# EAGLE board 0605 (EAGLE 9.6.2)
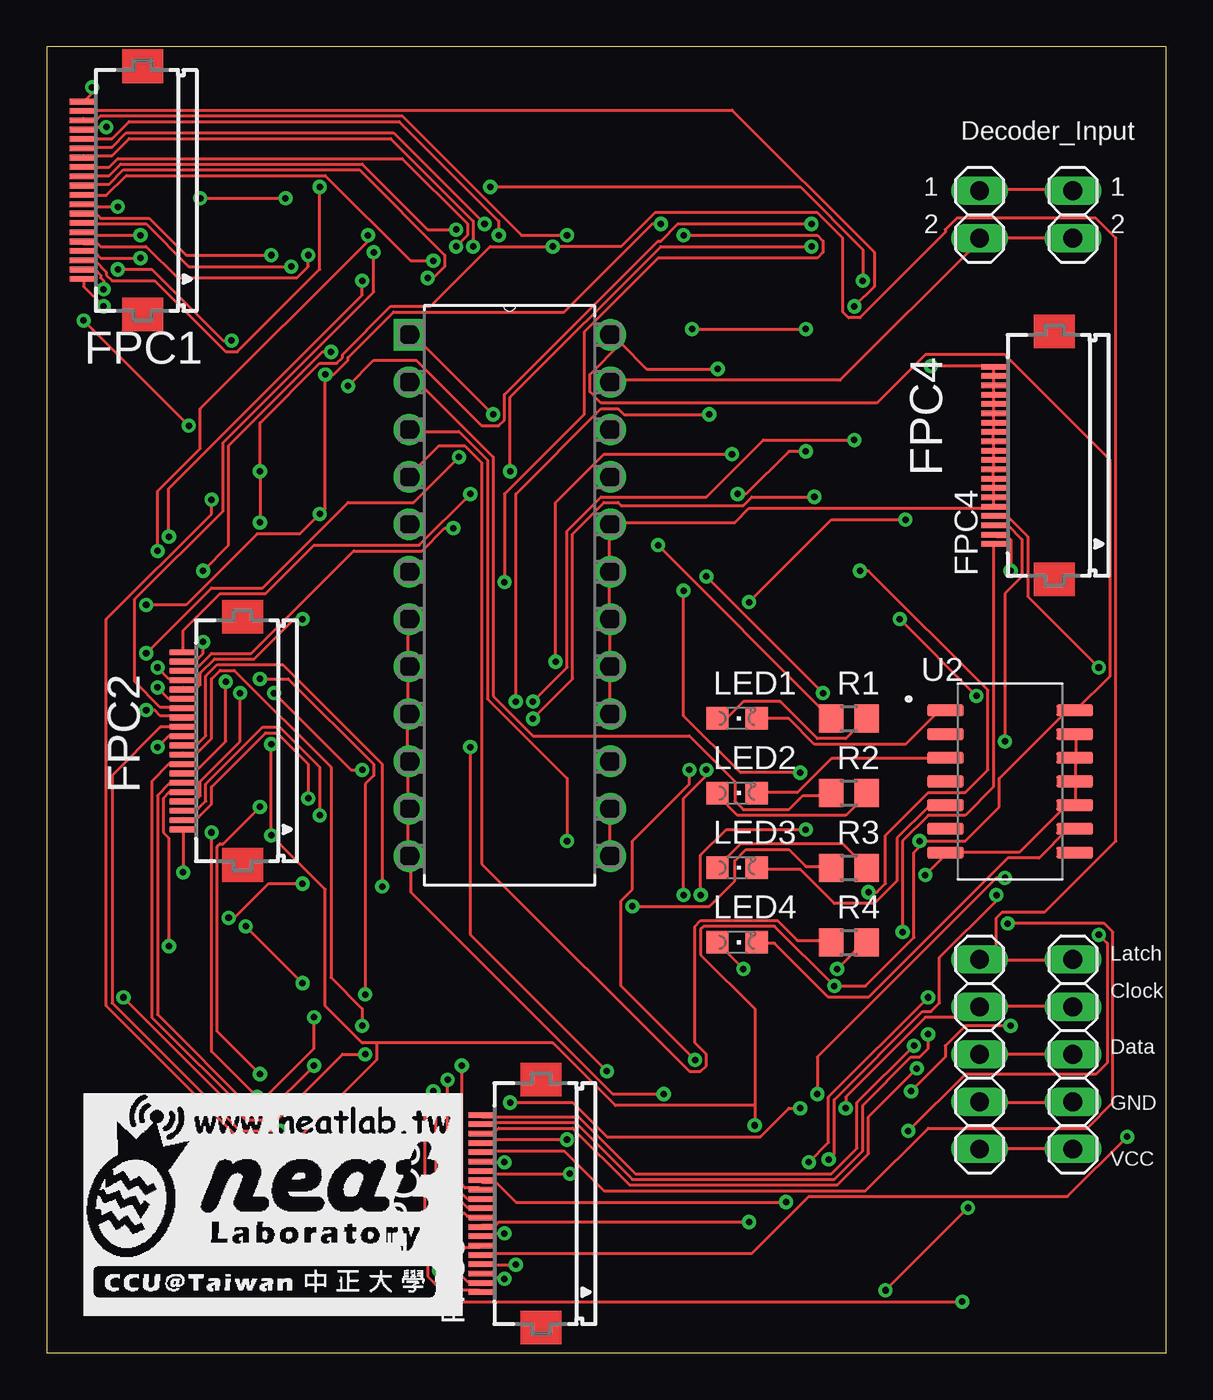
[diagram p0: board, top side]
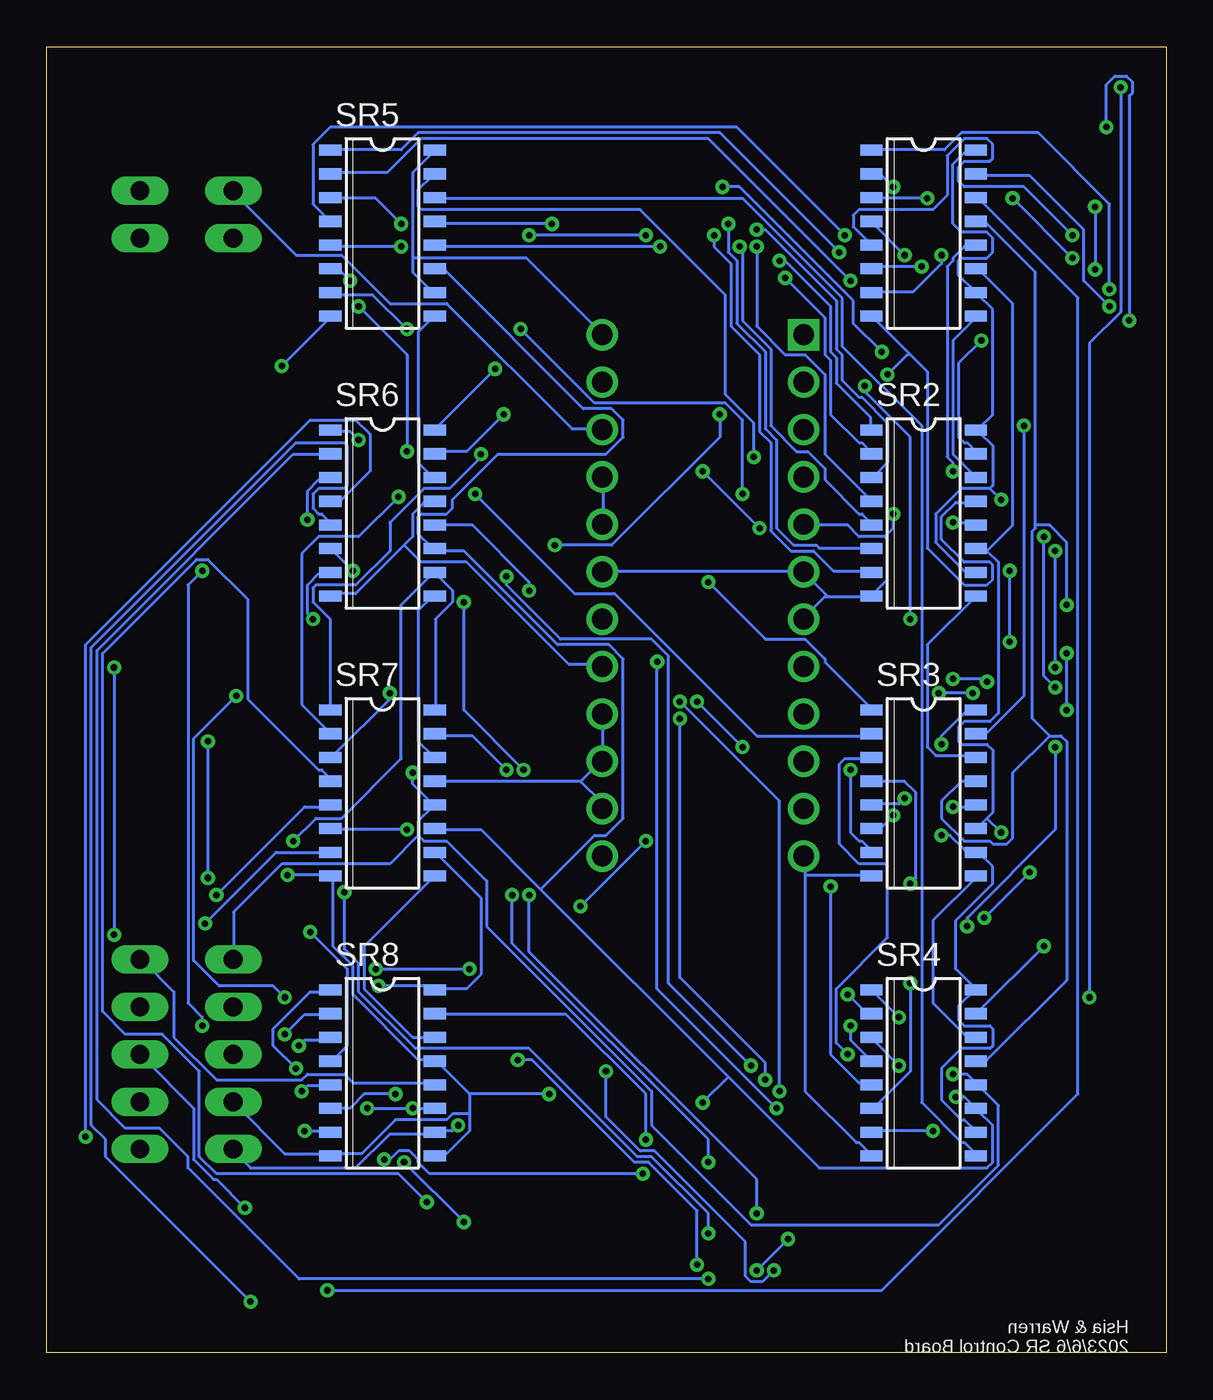
[diagram p1: board, bottom side, seen from below]

Size 60 x 70 mm. Coordinates in mm from the lower left corner, seen from the top.
Outline: 0,0 60,0 60,70 0,70 0,0
Copper layers (1*16): Top 0.035mm / dielectric 1.5mm / Bottom 0.035mm
Design rules "default": minimum track width 6mil, minimum drill 0.35mm, track to track 6mil, track to pad 6mil, pad to pad 6mil, via to via 6mil, smd to smd 6mil, copper to edge 40mil, drill to drill 6mil, minimum pad ring 10mil, minimum via ring 8mil, stop-mask expansion 4mil, vias tented up to drill 0mil, thermal gap 10mil

## Footprints (pad centres in the part's own frame; a part is rotated, then mirrored left to right if it is on the bottom)
FH12-20S-0.5SH = smd 0.3 x 1.3: 1 -4.75,3.25; 2 -4.25,3.25; 3 -3.75,3.25; 4 -3.25,3.25; 5 -2.75,3.25; 6 -2.25,3.25; 7 -1.75,3.25; 8 -1.25,3.25; 9 -0.75,3.25; 10 -0.25,3.25; 11 0.25,3.25; 12 0.75,3.25; 13 1.25,3.25; 14 1.75,3.25; 15 2.25,3.25; 16 2.75,3.25; 17 3.25,3.25; 18 3.75,3.25; 19 4.25,3.25; 20 4.75,3.25
1X02 = drill 1.016 long: 1 -1.27,0; 2 1.27,0
1X05 = drill 1.016 long: 1 -5.08,0; 2 -2.54,0; 3 0,0; 4 2.54,0; 5 5.08,0
CHIPLED_0805 = smd 1.2 x 1.2: A 0,-1.05; C 0,1.05
R0805 = smd 1.3 x 1.5: 1 -0.95,0; 2 0.95,0
SO16 = smd 0.6 x 1.2: 1 -4.445,-2.8; 2 -3.175,-2.8; 3 -1.905,-2.8; 4 -0.635,-2.8; 5 0.635,-2.8; 6 1.905,-2.8; 7 3.175,-2.8; 8 4.445,-2.8; 9 4.445,2.8; 10 3.175,2.8; 11 1.905,2.8; 12 0.635,2.8; 13 -0.635,2.8; 14 -1.905,2.8; 15 -3.175,2.8; 16 -4.445,2.8
DIP254P1080X508-24 = drill 1.118 square: 1 -10.795,27.94 | drill 1.118: 2 -10.795,25.4; 3 -10.795,22.86; 4 -10.795,20.32; 5 -10.795,17.78; 6 -10.795,15.24; 7 -10.795,12.7; 8 -10.795,10.16; 9 -10.795,7.62; 10 -10.795,5.08; 11 -10.795,2.54; 12 -10.795,0; 13 0,0; 14 0,2.54; 15 0,5.08; 16 0,7.62; 17 0,10.16; 18 0,12.7; 19 0,15.24; 20 0,17.78; 21 0,20.32; 22 0,22.86; 23 0,25.4; 24 0,27.94
SOP127P780X200-14N = smd 1.97 x 0.61: 1 -3.465,3.81; 2 -3.465,2.54; 3 -3.465,1.27; 4 -3.465,0; 5 -3.465,-1.27; 6 -3.465,-2.54; 7 -3.465,-3.81; 8 3.465,-3.81; 9 3.465,-2.54; 10 3.465,-1.27; 11 3.465,0; 12 3.465,1.27; 13 3.465,2.54; 14 3.465,3.81

## Placement (x,y rotation side)
FPC1  FH12-20S-0.5SH  [FH12-20S-0.5SH]  5.14,62.3 90 top
FPC2  FH12-20S-0.5SH  [FH12-20S-0.5SH]  10.5,32.8 90 top
FPC3  FH12-20S-0.5SH  [FH12-20S-0.5SH]  26.5,8 90 top
FPC4  FH12-20S-0.5SH  [FH12-20S-0.5SH]  54,48.1 90 top
JP1  [1X02]  55,61 90 top
JP2  [1X05]  55,16 90 top
JP3  [1X02]  50,61 90 top
JP4  [1X05]  50,16 90 top
LED1  [CHIPLED_0805]  37,34 270 top
LED2  [CHIPLED_0805]  37,30 270 top
LED3  [CHIPLED_0805]  37,26 270 top
LED4  [CHIPLED_0805]  37,22 270 top
R1  [R0805]  43,34 0 top
R2  [R0805]  43,30 0 top
R3  [R0805]  43,26 0 top
R4  [R0805]  43,22 0 top
SR1  74HC595  [SO16]  13,60 270 bottom
SR2  74HC595  [SO16]  13,45 270 bottom
SR3  74HC595  [SO16]  13,30 270 bottom
SR4  74HC595  [SO16]  13,15 270 bottom
SR5  74HC595  [SO16]  42,60 270 bottom
SR6  74HC595  [SO16]  42,45 270 bottom
SR7  74HC595  [SO16]  42,30 270 bottom
SR8  74HC595  [SO16]  42,15 270 bottom
U1  SN74154N  [DIP254P1080X508-24]  30.22,26.62 0 top
U2  SN74HC14NSR  [SOP127P780X200-14N]  51.63,30.62 0 top
U$1  [LOGO_SCALE_2.0]  2,2 0 top

## Library data of the parts
FPC1-FPC4 = con-hirose; MPN: FH12-20S-0.5SH(55); OC_FARNELL: 1324549; OC_NEWARK: 34M6166
JP1-JP4 = pinhead
LED1-LED4 = led
R1-R4 = rcl; SPICEPREFIX: R
SR1-SR8 = 74HC595; AVAILABILITY: In Stock; DESCRIPTION: Shift Register Single 8-Bit Serial to Serial/Parallel 16-Pin SSOP T/R; MF: Nexperia; MP: 74HC595; PACKAGE: None; PRICE: None
U1 = SN74154N; AVAILABILITY: In Stock; DESCRIPTION: Decoder/Demultiplexer 1 x 4:16 24-PDIP; MF: Texas Instruments; MP: SN74154N; PACKAGE: DIP-24 Texas Instruments; PRICE: None; PURCHASE-URL: https://pricing.snapeda.com/search?q=SN74154N&ref=eda
U2 = SN74HC14NSR; AVAILABILITY: In Stock; DESCRIPTION: 6-ch, 2-V to 6-V inverters with Schmitt-Trigger inputs; MF: Texas Instruments; MP: SN74HC14NSR; PACKAGE: SOP-14 Texas Instruments; PRICE: None; PURCHASE-URL: https://pricing.snapeda.com/search?q=SN74HC14NSR&ref=eda
U$1 = all_in_one

## Nets
CLK: JP2.4 JP4.4 SR1.11 SR2.11 SR3.11 SR4.11 SR5.11 SR6.11 SR7.11 SR8.11
DATA: JP2.3 JP4.3 SR1.14
DE_IN0: JP1.1 JP3.1 U1.23
DE_IN1: JP1.2 JP3.2 U1.22
DE_OUT0: R1.1 U1.1
DE_OUT1: R2.1 U1.2
DE_OUT2: R3.1 U1.3
DE_OUT3: R4.1 U1.4
GND: FPC4.5 FPC4.6 FPC4.7 FPC4.8 FPC4.9 FPC4.10 FPC4.11 FPC4.12 FPC4.13 FPC4.14 FPC4.15 FPC4.16 FPC4.17 FPC4.18 FPC4.19 FPC4.20 JP2.2 JP4.2 SR1.8 SR1.13 SR2.8 SR2.13 SR3.8 SR3.13 SR4.8 SR4.13 SR5.8 SR5.13 SR6.8 SR6.13 SR7.8 SR7.13 SR8.8 SR8.9 SR8.13 U1.5 U1.6 U1.7 U1.8 U1.9 U1.10 U1.11 U1.12 U1.13 U1.14 U1.15 U1.16 U1.17 U1.18 U1.19 U1.20 U1.21 U2.7 U2.10 U2.11 U2.12 U2.13
INV_IN0: LED1.C U2.1
INV_IN1: LED2.C U2.3
INV_IN2: LED3.C U2.5
INV_IN3: LED4.C U2.9
INV_OUT0: U2.2
INV_OUT1: U2.4
INV_OUT2: U2.6
INV_OUT3: U2.8
LATCH_CLK: JP2.5 JP4.5 SR1.12 SR2.12 SR3.12 SR4.12 SR5.12 SR6.12 SR7.12 SR8.12
N$1: SR1.9 SR2.14
N$2: LED1.A R1.2
N$3: LED2.A R2.2
N$4: LED3.A R3.2
N$5: LED4.A R4.2
N$8: SR2.9 SR3.14
N$15: SR3.9 SR4.14
N$22: SR7.9 SR8.14
N$34: SR6.9 SR7.14
N$36: SR4.9 SR5.14
N$43: SR5.9 SR6.14
SR_OUT1_1: FPC1.1 SR1.15
SR_OUT1_2: FPC1.2 SR1.1
SR_OUT1_3: FPC1.3 SR1.2
SR_OUT1_4: FPC1.4 SR1.3
SR_OUT1_5: FPC1.5 SR1.4
SR_OUT1_6: FPC1.6 SR1.5
SR_OUT1_7: FPC1.7 SR1.6
SR_OUT1_8: FPC1.8 SR1.7
SR_OUT2_1: FPC1.9 SR2.15
SR_OUT2_2: FPC1.10 SR2.1
SR_OUT2_3: FPC1.11 SR2.2
SR_OUT2_4: FPC1.12 SR2.3
SR_OUT2_5: FPC1.13 SR2.4
SR_OUT2_6: FPC1.14 SR2.5
SR_OUT2_7: FPC1.15 SR2.6
SR_OUT2_8: FPC1.16 SR2.7
SR_OUT3_1: FPC1.17 SR3.15
SR_OUT3_2: FPC1.18 SR3.1
SR_OUT3_3: FPC1.19 SR3.2
SR_OUT3_4: FPC1.20 SR3.3
SR_OUT3_5: FPC2.1 SR3.4
SR_OUT3_6: FPC2.2 SR3.5
SR_OUT3_7: FPC2.3 SR3.6
SR_OUT3_8: FPC2.4 SR3.7
SR_OUT4_1: FPC2.5 SR4.15
SR_OUT4_2: FPC2.6 SR4.1
SR_OUT4_3: FPC2.7 SR4.2
SR_OUT4_4: FPC2.8 SR4.3
SR_OUT4_5: FPC2.9 SR4.4
SR_OUT4_6: FPC2.10 SR4.5
SR_OUT4_7: FPC2.11 SR4.6
SR_OUT4_8: FPC2.12 SR4.7
SR_OUT5_1: FPC2.13 SR5.15
SR_OUT5_2: FPC2.14 SR5.1
SR_OUT5_3: FPC2.15 SR5.2
SR_OUT5_4: FPC2.16 SR5.3
SR_OUT5_5: FPC2.17 SR5.4
SR_OUT5_6: FPC2.18 SR5.5
SR_OUT5_7: FPC2.19 SR5.6
SR_OUT5_8: FPC2.20 SR5.7
SR_OUT6_1: FPC3.1 SR6.15
SR_OUT6_2: FPC3.2 SR6.1
SR_OUT6_3: FPC3.3 SR6.2
SR_OUT6_4: FPC3.4 SR6.3
SR_OUT6_5: FPC3.5 SR6.4
SR_OUT6_6: FPC3.6 SR6.5
SR_OUT6_7: FPC3.7 SR6.6
SR_OUT6_8: FPC3.8 SR6.7
SR_OUT7_1: FPC3.9 SR7.15
SR_OUT7_2: FPC3.10 SR7.1
SR_OUT7_3: FPC3.11 SR7.2
SR_OUT7_4: FPC3.12 SR7.3
SR_OUT7_5: FPC3.13 SR7.4
SR_OUT7_6: FPC3.14 SR7.5
SR_OUT7_7: FPC3.15 SR7.6
SR_OUT7_8: FPC3.16 SR7.7
SR_OUT8_1: FPC3.17 SR8.15
SR_OUT8_2: FPC3.18 SR8.1
SR_OUT8_3: FPC3.19 SR8.2
SR_OUT8_4: FPC3.20 SR8.3
SR_OUT8_5: FPC4.1 SR8.4
SR_OUT8_6: FPC4.2 SR8.5
SR_OUT8_7: FPC4.3 SR8.6
SR_OUT8_8: FPC4.4 SR8.7
VCC: JP2.1 JP4.1 SR1.10 SR1.16 SR2.10 SR2.16 SR3.10 SR3.16 SR4.10 SR4.16 SR5.10 SR5.16 SR6.10 SR6.16 SR7.10 SR7.16 SR8.10 SR8.16 U1.24 U2.14

## Tracks (layer width: path | path; a pad name or v marks a point on that pad's centre or on a via)
CLK  (via drill 0.35)
  Top 0.152: v42.82,13.11 42.82,13.72 47.09,17.98 49.53,17.98 49.99,18.44 JP4.4 50.14,18.59 54.86,18.59 JP2.4 | v40.39,13.11 39.78,13.11 38.25,11.58 30.02,11.58 28.19,13.41 v24.84,13.41 | v8.84,27.89 8.84,16.15 v11.28,13.72
  Bottom 0.152: 9.6,28.65 9.3,28.96 9.3,32.31 9.6,32.61 10.97,32.61 11.12,32.77 11.12,33.53 10.82,33.83 9.45,33.83 8.99,34.29 8.99,42.37 9.6,42.98 | 9.6,28.65 10.06,28.19 SR3.11 | 9.6,42.98 10.06,42.98 SR2.11 9.6,42.98 | 9.6,42.98 8.23,44.35 8.23,56.24 10.06,58.06 SR1.11 | v42.82,13.11 v40.39,13.11 39.32,13.11 SR8.11 | 33.53,24.84 36.73,28.04 39.17,28.04 SR7.11 | 33.53,24.84 23.47,14.78 | 23.47,14.78 18.59,9.91 9.6,9.91 9.3,10.21 9.3,12.19 10.06,12.95 SR4.11 10.21,13.11 10.82,13.72 v11.28,13.72 | 33.53,24.84 30.63,27.74 30.02,27.74 29.11,28.65 29.11,37.19 29.87,37.95 32.61,37.95 37.64,42.98 39.17,42.98 SR6.11 39.32,43.13 40.08,43.89 40.08,44.81 39.93,44.96 38.56,44.96 38.25,45.26 38.25,45.72 35.81,48.16 30.02,48.16 29.11,49.07 29.11,49.99 29.72,50.6 31.24,50.6 38.71,58.06 39.17,58.06 SR5.11 | 23.47,14.78 v24.84,13.41 | v8.84,27.89 9.6,28.65
DATA  (via drill 0.35)
  Top 0.152: v49.38,7.77 v44.96,3.35 | JP4.3 50.14,16 54.86,16 JP2.3
  Bottom 0.152: v44.96,3.35 15.24,3.35 4.72,13.87 4.72,56.54 10.06,61.87 SR1.14 | v49.38,7.77 50.9,9.3 51.05,9.3 52.12,10.36 52.12,13.11 54.86,15.85 JP2.3
DE_IN0
  Top 0.152: JP1.1 54.86,59.74 50.14,59.74 JP3.1 49.99,59.59 42.52,52.12 30.33,52.12 U1.23
DE_IN1
  Top 0.152: JP3.2 50.14,62.33 54.86,62.33 JP1.2
  Bottom 0.152: U1.22 30.33,49.53 31.85,49.53 38.56,56.24 41.6,56.24 44.2,58.83 46.63,58.83 49.99,62.18 JP3.2
DE_OUT0  (via drill 0.35)
  Top 0.152: v32.77,43.28 41.91,34.14 R1.1 | v23.93,50.29 19.51,54.71 U1.1
  Bottom 0.152: v32.77,43.28 29.72,43.28 23.93,49.07 v23.93,50.29
DE_OUT1
  Top 0.152: R2.1 41.91,29.87 40.54,29.87 39.78,29.11 37.34,29.11 36.88,29.57 36.88,30.63 34.44,33.07 26.06,33.07 23.93,35.2 23.93,48.01 19.96,51.97 19.51,51.97 U1.2
DE_OUT2  (via drill 0.35)
  Top 0.152: v31.39,23.93 35.51,23.93 36.88,25.3 36.88,26.36 37.49,26.98 39.78,26.98 40.69,26.06 41.91,26.06 R3.1 | v27.89,27.43 27.89,30.79 23.62,35.05 23.62,47.85 22.1,49.38 19.51,49.38 U1.3
  Bottom 0.152: v27.89,27.43 v31.39,23.93
DE_OUT3
  Top 0.152: R4.1 41.91,22.1 40.23,22.1 39.17,23.16 35.05,23.16 34.75,22.86 34.75,16.61 35.36,16 35.36,15.39 35.05,15.09 34.44,15.09 23.32,26.21 23.32,47.7 22.4,48.62 21.03,48.62 19.51,47.09 U1.4
GND  (via drill 0.35)
  Top 0.152: v32.92,60.5 32.46,60.5 27.74,55.78 18.59,55.78 16.15,53.34 16.15,53.19 15.39,52.43 v14.94,52.43 14.94,45.26 v14.63,44.96 13.56,43.89 11.28,43.89 7.47,40.08 v5.33,40.08 | JP2.2 54.86,13.41 50.14,13.41 JP4.2 | U2.13 55.17,33.07 55.17,32 U2.12 55.17,31.85 55.17,30.63 U2.11 55.17,30.48 55.17,29.41 U2.10 55.02,29.26 54.56,29.26 52.12,26.82 48.31,26.82 U2.7 48.16,26.67 v47.09,25.6 | U1.7 19.36,39.32 19.36,36.88 U1.8 19.36,36.73 19.36,34.29 U1.9 19.36,34.14 19.36,31.85 U1.10 19.36,31.7 19.36,29.26 U1.11 19.36,29.11 19.36,26.67 U1.12 19.51,26.52 19.51,24.69 30.33,13.87 v33.07,13.87 | U1.13 30.18,26.67 30.18,29.11 U1.14 | v47.4,52.88 50.75,52.88 FPC4.20 50.75,52.73 50.75,52.43 FPC4.19 50.75,52.27 50.75,51.97 FPC4.18 50.75,51.82 FPC4.17 50.75,51.21 50.75,50.9 FPC4.16 50.75,50.75 50.75,50.44 FPC4.15 50.75,50.29 50.75,49.99 FPC4.14 50.75,49.84 50.75,49.38 FPC4.13 50.75,49.23 50.75,48.92 FPC4.12 50.75,48.77 50.75,48.46 FPC4.11 50.75,48.31 FPC4.10 50.75,47.7 50.75,47.4 FPC4.9 50.75,47.24 50.75,46.94 FPC4.8 50.75,46.79 50.75,46.48 FPC4.7 50.75,46.33 50.75,45.87 FPC4.6 50.75,45.72 50.75,45.41 FPC4.5 50.75,45.26 37.64,45.26 36.88,44.5 30.33,44.5 U1.20 30.18,44.35 30.18,41.91 U1.19 30.18,41.76 30.18,39.47 U1.18 30.18,39.32 30.18,36.88 U1.17 30.18,36.73 30.18,34.29 U1.16
  Bottom 0.152: 6.25,33.07 5.64,33.07 5.33,32.77 5.33,19.96 9.6,15.7 10.06,15.7 SR4.13 | 6.25,33.07 8.23,31.09 8.23,27.58 8.53,27.28 9.3,27.28 9.45,27.43 10.82,27.43 12.04,28.65 12.04,29.57 10.97,30.63 10.21,30.63 SR3.13 | 7.01,44.35 7.01,44.2 7.16,44.04 7.16,33.98 6.25,33.07 | 7.01,44.35 7.01,57.91 9.6,60.5 10.06,60.5 SR1.13 | 13.72,53.49 15.7,55.47 SR1.8 | 13.72,53.49 12.8,52.58 12.8,43.13 10.82,41.15 9.6,41.15 9.3,41.45 9.3,42.22 9.45,42.37 10.82,42.37 12.04,43.59 12.04,44.81 11.28,45.57 10.21,45.57 SR2.13 | v32.92,60.5 39.17,60.5 SR5.13 | v14.94,52.43 13.87,53.49 13.72,53.49 | JP4.2 49.99,13.41 47.24,10.67 44.81,10.67 SR8.8 44.65,10.67 43.13,10.67 41.3,12.5 38.56,12.5 38.25,12.8 37.34,12.8 | 37.34,13.87 37.34,12.8 | 37.34,12.8 37.34,11.89 38.56,10.67 39.17,10.67 SR8.9 | 37.34,13.87 39.17,15.7 SR8.13 39.32,15.7 40.08,15.7 43.59,19.2 43.59,20.73 44.65,21.79 44.65,25.45 SR7.8 44.81,25.6 v47.09,25.6 | 19.36,25.6 19.36,26.52 U1.12 | 19.36,25.6 19.36,14.02 16.61,11.28 16.46,11.28 15.85,10.67 SR4.8 | 19.36,25.6 15.85,25.6 SR3.8 | 18.14,40.54 18.29,40.54 19.36,39.47 U1.7 | 18.14,40.54 15.85,40.54 SR2.8 15.7,40.69 14.94,41.45 14.94,43.59 15.09,43.74 | 18.14,40.54 19.36,41.76 U1.6 19.51,41.91 30.18,41.91 U1.19 | 15.09,43.74 16.46,43.74 17.07,44.35 19.36,44.35 U1.5 | 31.39,30.63 39.17,30.63 SR7.13 | 31.39,30.63 30.33,31.7 U1.15 30.18,31.85 30.18,34.14 U1.16 | 31.39,30.63 30.33,29.57 30.33,29.26 U1.14 | v47.4,52.88 44.81,55.47 SR5.8 | 40.84,43.28 40.39,43.74 40.39,44.96 39.78,45.57 39.32,45.57 SR6.13 | 40.84,43.28 43.43,40.69 44.65,40.69 SR6.8 | U1.20 30.18,44.5 30.18,46.94 U1.21
  Bottom 0.152: 40.84,43.28 39.93,42.37 37.49,42.37 32,36.88 30.33,36.88 U1.17 | v33.07,13.87 37.34,13.87 | v14.63,44.96 14.63,44.2 15.09,43.74 | 7.01,44.35 6.25,44.35 5.33,43.43 v5.33,40.08
INV_IN0
  Top 0.152: LED1.C 38.1,33.98 39.78,33.98 41.15,32.61 46.02,32.61 47.7,34.29 48.16,34.29 U2.1
INV_IN1
  Top 0.152: LED2.C 38.1,30.02 40.23,30.02 42.06,31.85 48.16,31.85 U2.3
INV_IN2
  Top 0.152: LED3.C 38.1,25.91 40.39,25.91 42.22,24.08 44.35,24.08 45.57,25.3 45.57,27.58 47.24,29.26 48.16,29.26 U2.5
INV_IN3
  Top 0.152: LED4.C 38.1,21.95 39.01,21.95 41.91,19.05 44.04,19.05 51.51,26.52 53.19,26.52 54.71,28.04 55.02,28.04 U2.9
LATCH_CLK  (via drill 0.35)
  Top 0.152: v11.43,44.5 v11.43,47.24 11.43,49.84 14.63,53.03 15.54,53.03 15.85,53.34 15.85,53.49 18.44,56.08 20.57,56.08 23.77,59.28 v27.13,59.28 30.79,59.28 32.61,61.11 41.3,61.11 42.67,59.74 42.67,55.78 42.98,55.47 43.59,55.47 48.16,60.05 48.16,60.2 48.77,60.81 56.24,60.81 57.3,59.74 57.3,27.43 53.49,23.62 51.21,23.62 50.9,23.32 50.9,21.03 | 50.9,21.03 54.86,21.03 JP2.5 | 50.9,21.03 50.14,21.03 JP4.5 50.9,21.03 | v11.43,29.26 9.45,27.28 9.3,27.28 9.14,27.13 9.14,17.22 v11.43,14.94 | v34.14,40.84 34.14,34.14 37.19,31.09 v40.39,31.09
  Bottom 0.152: v11.43,44.5 10.21,44.5 SR2.12 | v11.43,47.24 11.43,47.7 11.73,48.01 11.73,58.22 11.43,58.52 11.43,58.67 10.82,59.28 10.21,59.28 SR1.12 | v27.13,59.28 39.17,59.28 SR5.12 | SR8.12 39.32,14.48 43.59,14.48 44.04,14.94 46.02,14.94 46.33,14.63 50.9,14.63 53.19,16.92 53.19,19.36 54.86,21.03 JP2.5 | 40.08,27.74 39.78,27.43 38.56,27.43 36.42,25.3 36.42,22.86 27.58,14.02 27.58,12.19 22.25,6.86 12.19,6.86 8.99,10.06 8.99,13.26 10.06,14.33 SR4.12 10.21,14.48 10.67,14.94 v11.43,14.94 | 40.08,27.74 40.08,28.5 39.32,29.26 SR7.12 39.32,29.41 40.39,30.48 v40.39,31.09 | v11.43,29.26 10.21,29.26 SR3.12 | v34.14,40.84 34.14,41.3 37.19,44.35 39.17,44.35 SR6.12 | 40.08,27.74 41.6,26.21 47.4,26.21 49.99,23.62 49.99,21.18 JP4.5
N$1
  Bottom 0.152: SR2.14 10.21,46.94 11.43,48.16 11.43,54.25 10.21,55.47 SR1.9
N$2
  Top 0.152: LED1.A 35.97,34.14 36.58,34.14 37.34,34.9 39.32,34.9 41.3,32.92 42.82,32.92 43.89,33.98 R1.2
N$3
  Top 0.152: LED2.A 35.97,29.87 37.03,28.8 42.82,28.8 43.89,29.87 R2.2
N$4
  Top 0.152: LED3.A 35.97,26.06 37.19,27.28 42.67,27.28 43.89,26.06 R3.2
N$5  (via drill 0.35)
  Top 0.152: v37.34,20.57 35.97,21.95 LED4.A | v42.37,20.57 43.89,22.1 R4.2
  Bottom 0.152: v42.37,20.57 v37.34,20.57
N$8
  Bottom 0.152: SR3.14 10.21,32 12.34,32 12.8,32.46 12.8,37.95 10.21,40.54 SR2.9
N$15
  Bottom 0.152: SR4.14 10.21,16.92 10.67,16.92 12.5,18.75 12.5,23.16 10.21,25.45 SR3.9
N$22
  Bottom 0.152: SR8.14 39.32,16.92 40.39,16.92 42.98,19.51 42.98,21.79 39.32,25.45 SR7.9
N$34
  Bottom 0.152: SR7.14 39.32,32 40.08,32.77 40.08,39.78 39.32,40.54 SR6.9
N$36
  Bottom 0.152: SR4.9 10.21,10.67 10.82,11.28 10.97,11.28 13.11,13.41 13.11,49.68 17.37,53.95 17.37,56.54 22.71,61.87 39.17,61.87 SR5.14
N$43
  Bottom 0.152: SR6.14 39.32,46.94 40.08,47.7 40.08,54.71 39.32,55.47 SR5.9
SR_OUT1_1  (via drill 0.35)
  Top 0.152: v3.05,56.08 1.98,57.15 1.98,57.45 FPC1.1
  Bottom 0.152: v3.05,56.08 4.42,57.45 4.42,60.2 7.32,63.09 10.06,63.09 SR1.15
SR_OUT1_2  (via drill 0.35)
  Top 0.152: v3.05,57 3.05,57.45 2.9,57.61 2.9,57.76 2.59,58.06 1.98,58.06 FPC1.2
  Bottom 0.152: v3.05,57 3.05,61.57 6.86,65.38 10.97,65.38 11.89,64.47 15.7,64.47 SR1.1
SR_OUT1_3  (via drill 0.35)
  Top 0.152: v14.63,62.48 14.63,58.06 10.21,53.65 9.6,53.65 5.79,57.45 3.5,57.45 3.2,57.76 3.2,57.91 2.59,58.52 1.98,58.52 FPC1.3
  Bottom 0.152: v14.63,62.48 15.24,63.09 15.7,63.09 SR1.2
SR_OUT1_4  (via drill 0.35)
  Top 0.152: v8.23,61.87 v12.8,61.87 | v5.03,58.67 2.9,58.67 2.59,58.98 1.98,58.98 FPC1.4
  Bottom 0.152: v12.8,61.87 15.7,61.87 SR1.3 | v5.03,58.67 v8.23,61.87
SR_OUT1_5  (via drill 0.35)
  Top 0.152: v14.02,58.83 14.02,58.22 13.41,57.61 7.01,57.61 5.33,59.28 2.9,59.28 2.74,59.44 1.98,59.44 FPC1.5
  Bottom 0.152: v14.02,58.83 15.7,60.5 SR1.4
SR_OUT1_6  (via drill 0.35)
  Top 0.152: v5.03,59.89 2.74,59.89 2.59,60.05 1.98,60.05 FPC1.6
  Bottom 0.152: v5.03,59.89 7.62,62.48 10.82,62.48 11.12,62.79 11.12,63.55 10.82,63.86 9.45,63.86 9.3,64.01 9.3,64.77 9.6,65.08 10.82,65.08 11.73,64.16 11.73,62.03 12.5,61.27 16.46,61.27 16.76,60.96 16.76,60.35 15.85,59.44 SR1.5
SR_OUT1_7  (via drill 0.35)
  Top 0.152: v13.11,58.22 7.62,58.22 5.33,60.5 1.98,60.5 FPC1.7
  Bottom 0.152: v13.11,58.22 15.7,58.22 SR1.6
SR_OUT1_8  (via drill 0.35)
  Top 0.152: v12.04,58.83 7.47,58.83 5.49,60.81 2.9,60.81 2.74,60.96 1.98,60.96 FPC1.8
  Bottom 0.152: v12.04,58.83 12.04,58.37 13.56,56.84 15.7,56.84 SR1.7
SR_OUT2_1  (via drill 0.35)
  Top 0.152: v9.91,54.25 9.45,54.25 5.64,58.06 v3.81,58.06 | v3.81,61.42 2.74,61.42 2.59,61.57 1.98,61.57 FPC1.9
  Bottom 0.152: v9.91,54.25 11.12,53.03 11.12,49.07 10.82,48.77 10.67,48.77 10.21,48.31 SR2.15 | v3.81,61.42 v3.81,58.06
SR_OUT2_2  (via drill 0.35)
  Top 0.152: v20.73,58.52 19.51,58.52 14.94,63.09 4.27,63.09 3.2,62.03 1.98,62.03 FPC1.10
  Bottom 0.152: v20.73,58.52 20.42,58.52 17.98,56.08 17.98,53.65 17.68,53.34 17.68,51.97 15.85,50.14 15.85,49.53 SR2.1
SR_OUT2_3  (via drill 0.35)
  Top 0.152: v20.42,57.61 20.73,57.61 21.34,58.22 21.34,58.83 16.76,63.4 4.12,63.4 3.35,62.64 1.98,62.64 FPC1.11
  Bottom 0.152: v20.42,57.61 18.29,55.47 18.29,53.49 17.98,53.19 17.98,50.29 16.46,48.77 16.31,48.77 15.85,48.31 SR2.2
SR_OUT2_4  (via drill 0.35)
  Top 0.152: v21.95,60.2 20.42,60.2 16.92,63.7 3.96,63.7 3.35,63.09 1.98,63.09 FPC1.12
  Bottom 0.152: v21.95,60.2 21.49,60.2 17.68,56.39 17.68,53.8 17.37,53.49 17.37,52.12 16.46,51.21 16.31,51.21 14.94,49.84 14.94,47.7 15.7,46.94 SR2.3
SR_OUT2_5  (via drill 0.35)
  Top 0.152: v21.95,59.28 22.55,59.89 22.55,60.5 19.05,64.01 3.81,64.01 3.35,63.55 1.98,63.55 FPC1.13
  Bottom 0.152: v21.95,59.28 21.95,55.02 20.42,53.49 19.36,53.49 18.29,52.43 18.29,48.16 15.85,45.72 SR2.4
SR_OUT2_6  (via drill 0.35)
  Top 0.152: v22.86,59.28 22.86,60.66 18.44,65.08 4.42,65.08 3.5,64.16 1.98,64.16 FPC1.14
  Bottom 0.152: v22.86,59.28 22.71,59.13 22.71,55.32 21.18,53.8 21.18,49.68 19.81,48.31 19.2,48.31 18.29,47.4 18.29,46.79 16.46,44.96 16.31,44.96 15.85,44.5 SR2.5
SR_OUT2_7  (via drill 0.35)
  Top 0.152: v23.47,60.5 18.59,65.38 4.27,65.38 3.5,64.62 1.98,64.62 FPC1.15
  Bottom 0.152: v23.47,60.5 23.47,58.98 23.01,58.52 23.01,55.17 21.49,53.65 21.49,49.53 20.88,48.92 20.88,44.2 19.96,43.28 18.75,43.28 18.59,43.13 15.85,43.13 SR2.6
SR_OUT2_8  (via drill 0.35)
  Top 0.152: v24.23,59.89 24.23,60.66 18.9,65.99 4.42,65.99 3.5,65.08 1.98,65.08 FPC1.16
  Bottom 0.152: v24.23,59.89 24.23,59.28 23.32,58.37 23.32,55.02 21.79,53.49 21.79,49.38 21.18,48.77 21.18,44.04 20.12,42.98 18.9,42.98 17.83,41.91 15.85,41.91 SR2.7
SR_OUT3_1  (via drill 0.35)
  Top 0.152: v1.98,55.32 v7.62,49.68 | v3.2,65.68 2.74,65.68 2.59,65.53 1.98,65.53 FPC1.17
  Bottom 0.152: v7.62,49.68 7.62,35.2 9.6,33.22 10.06,33.22 SR3.15 | v1.98,55.32 1.98,67.36 1.83,67.51 1.83,68.12 2.13,68.43 2.74,68.43 3.2,67.97 v3.2,65.68
SR_OUT3_2  (via drill 0.35)
  Top 0.152: v24.54,41.3 24.54,46.02 28.8,50.29 28.8,54.71 32.77,58.67 41.3,58.67 41.6,58.98 41.6,59.59 41.3,59.89 v34.14,59.89 | v27.89,59.89 25.45,59.89 19.05,66.29 2.9,66.29 2.74,66.14 1.98,66.14 FPC1.18
  Bottom 0.152: v24.54,41.3 21.49,38.25 19.36,38.25 18.29,37.19 18.29,37.03 15.85,34.59 SR3.1 | v27.89,59.89 v34.14,59.89
SR_OUT3_3  (via drill 0.35)
  Top 0.152: v37.03,46.02 37.49,46.02 39.78,48.31 v40.69,48.31 | v43.28,56.08 44.35,57.15 44.35,58.98 36.73,66.6 1.98,66.6 FPC1.19
  Bottom 0.152: v37.03,46.02 31.7,40.69 29.57,40.69 21.95,33.07 15.85,33.07 SR3.2 | v40.69,48.31 40.69,53.49 v43.28,56.08
SR_OUT3_4  (via drill 0.35)
  Top 0.152: v17.07,16 15.85,16 12.34,12.5 10.67,12.5 v4.12,19.05 | v2.44,67.82 2.44,67.51 1.98,67.06 FPC1.20
  Bottom 0.152: v17.07,16 17.68,16.61 17.68,19.51 14.94,22.25 14.94,26.06 15.09,26.21 16.46,26.21 17.53,27.28 17.53,31.55 17.22,31.85 15.85,31.85 SR3.3 | v4.12,19.05 4.12,54.1 2.44,55.78 v2.44,67.82
SR_OUT3_5  (via drill 0.35)
  Top 0.152: v13.72,25.15 11.89,25.15 10.06,23.32 v9.75,23.32 | v7.32,25.76 7.32,28.04 FPC2.1
  Bottom 0.152: v13.72,25.15 13.41,25.45 13.41,30.02 14.02,30.63 15.7,30.63 SR3.4 | v7.32,25.76 v9.75,23.32
SR_OUT3_6  (via drill 0.35)
  Top 0.152: v14.02,29.72 14.02,31.55 12.34,33.22 11.73,33.22 8.84,30.33 8.84,29.41 8.08,28.65 7.32,28.65 FPC2.2
  Bottom 0.152: v14.02,29.72 14.33,29.41 15.7,29.41 SR3.5
SR_OUT3_7  (via drill 0.35)
  Top 0.152: v14.63,28.8 14.63,31.39 12.5,33.53 11.58,33.53 8.53,30.48 8.53,29.57 8.08,29.11 7.32,29.11 FPC2.3
  Bottom 0.152: v14.63,28.8 15.24,28.19 15.7,28.19 SR3.6
SR_OUT3_8  (via drill 0.35)
  Top 0.152: v16.92,31.24 16.31,31.24 v12.19,35.36 | v10.36,35.36 10.36,32.77 8.23,30.63 8.23,29.87 7.92,29.57 7.32,29.57 FPC2.4
  Bottom 0.152: v16.92,31.24 16.92,27.89 16.46,27.43 16.31,27.43 15.85,26.98 SR3.7 | v10.36,35.36 v12.19,35.36
SR_OUT4_1  (via drill 0.35)
  Top 0.152: v6.55,21.79 6.55,27.58 6.25,27.89 6.25,29.72 6.55,30.02 7.16,30.02 FPC2.5
  Bottom 0.152: v6.55,21.79 10.06,18.29 SR4.15
SR_OUT4_2  (via drill 0.35)
  Top 0.152: v14.33,17.98 14.33,16.31 11.89,13.87 11.89,13.41 11.58,13.11 10.97,13.11 5.94,18.14 5.94,29.87 6.55,30.48 7.16,30.48 FPC2.6
  Bottom 0.152: v14.33,17.98 15.7,19.36 SR4.1
SR_OUT4_3  (via drill 0.35)
  Top 0.152: v17.07,19.2 17.07,30.48 17.53,30.94 17.53,31.55 12.95,36.12 v11.43,36.12 | v9.6,35.97 9.6,32.77 7.92,31.09 7.32,31.09 FPC2.7
  Bottom 0.152: v17.07,19.2 16.15,18.29 15.85,18.29 SR4.2 | v11.43,36.12 9.75,36.12 v9.6,35.97
SR_OUT4_4  (via drill 0.35)
  Top 0.152: v14.33,15.39 11.73,12.8 10.82,12.8 5.64,17.98 5.64,30.63 6.55,31.55 7.16,31.55 FPC2.8
  Bottom 0.152: v14.33,15.39 15.7,16.76 SR4.3
SR_OUT4_5  (via drill 0.35)
  Top 0.152: v16.92,17.53 16.92,18.44 15.24,20.12 15.24,31.39 10.06,36.58 9.3,36.58 8.84,36.12 8.84,32.92 8.08,32.16 7.32,32.16 FPC2.9
  Bottom 0.152: v16.92,17.53 16.92,16.76 15.85,15.7 SR4.4
SR_OUT4_6  (via drill 0.35)
  Top 0.152: v17.98,24.99 17.98,31.55 12.65,36.88 9.14,36.88 8.53,36.27 8.53,33.07 8.08,32.61 7.32,32.61 FPC2.10
  Bottom 0.152: v17.98,24.99 17.98,16 16.46,14.48 15.85,14.48 SR4.5
SR_OUT4_7  (via drill 0.35)
  Top 0.152: v10.67,22.86 v13.72,19.81 | v5.94,32.46 6.55,33.07 7.16,33.07 FPC2.11
  Bottom 0.152: v13.72,19.81 13.72,15.09 15.7,13.11 SR4.6 | v10.67,22.86 10.67,23.32 5.94,28.04 v5.94,32.46
SR_OUT4_8  (via drill 0.35)
  Top 0.152: v12.5,11.89 10.36,11.89 3.5,18.75 3.5,30.94 6.1,33.53 7.16,33.53 FPC2.12
  Bottom 0.152: v12.5,11.89 15.7,11.89 SR4.7
SR_OUT5_1  (via drill 0.35)
  Top 0.152: v22.1,48.01 19.66,45.57 16.15,45.57 11.58,41 8.84,41 v5.33,37.49 | v5.33,34.44 5.79,34.44 6.1,34.14 7.16,34.14 FPC2.13
  Bottom 0.152: v22.1,48.01 22.1,49.84 23.62,51.36 23.62,56.69 28.19,61.27 39.93,61.27 40.08,61.42 40.08,62.33 39.32,63.09 SR5.15 | v5.33,34.44 v5.33,37.49
SR_OUT5_2  (via drill 0.35)
  Top 0.152: v17.53,58.98 17.53,56.84 9.45,48.77 9.45,45.11 4.72,40.39 4.72,35.97 6.1,34.59 7.16,34.59 FPC2.14
  Bottom 0.152: v17.53,58.98 23.93,65.38 40.08,65.38 41,64.47 44.65,64.47 SR5.1
SR_OUT5_3  (via drill 0.35)
  Top 0.152: v16.92,57.45 16.92,56.69 6.55,46.33 v6.55,43.74 | v5.94,35.66 6.55,35.05 7.16,35.05 FPC2.15
  Bottom 0.152: v16.92,57.45 24.54,65.08 39.93,65.08 41.76,63.25 44.65,63.25 SR5.2 | v6.55,43.74 6.55,36.27 v5.94,35.66
SR_OUT5_4  (via drill 0.35)
  Top 0.152: v41,60.5 33.83,60.5 32.92,59.59 32.77,59.59 24.54,51.36 24.54,49.99 24.23,49.68 23.32,49.68 19.81,53.19 17.53,53.19 v16.15,51.82 | v13.72,39.32 13.26,39.32 11.12,37.19 8.99,37.19 8.23,36.42 8.23,35.81 8.08,35.66 7.32,35.66 FPC2.16
  Bottom 0.152: v41,60.5 42.37,61.87 44.65,61.87 SR5.3 | v16.15,51.82 16.15,51.51 13.72,49.07 v13.72,39.32
SR_OUT5_5  (via drill 0.35)
  Top 0.152: v17.22,59.89 17.22,59.59 8.23,50.6 8.23,48.46 5.94,46.18 v5.94,42.98 | v5.94,36.73 6.55,36.12 7.16,36.12 FPC2.17
  Bottom 0.152: v17.22,59.89 23.01,65.68 44.81,65.68 45.72,64.77 45.72,61.57 44.81,60.66 SR5.4 | v5.94,36.73 v5.94,42.98
SR_OUT5_6  (via drill 0.35)
  Top 0.152: v41,59.28 32.92,59.28 24.84,51.21 v24.84,47.24 | v21.79,44.2 21.34,44.2 20.12,42.98 16.46,42.98 10.97,37.49 8.84,37.49 7.92,36.58 7.32,36.58 FPC2.18
  Bottom 0.152: v41,59.28 44.65,59.28 SR5.5 | v21.79,44.2 v24.84,47.24
SR_OUT5_7  (via drill 0.35)
  Top 0.152: v43.74,57.45 43.74,59.13 40.39,62.48 v23.77,62.48 | v15.24,53.65 14.78,53.65 9.75,48.62 9.75,43.28 v8.38,41.91 | v8.38,38.1 8.38,37.49 7.92,37.03 7.32,37.03 FPC2.19
  Bottom 0.152: v43.74,57.45 44.35,58.06 44.65,58.06 SR5.6 | v23.77,62.48 22.86,62.48 16.76,56.39 16.76,55.17 v15.24,53.65 | v8.38,38.1 v8.38,41.91
SR_OUT5_8  (via drill 0.35)
  Top 0.152: v34.59,54.86 v40.69,54.86 | v22.71,46.02 19.96,43.28 14.33,43.28 11.73,40.69 9.3,40.69 7.32,38.71 7.32,37.64 FPC2.20
  Bottom 0.152: v40.69,54.86 42.52,56.69 44.65,56.69 SR5.7 | v34.59,54.86 30.63,50.9 23.62,50.9 22.71,49.99 v22.71,46.02
SR_OUT6_1  (via drill 0.35)
  Top 0.152: v35.51,50.29 30.94,50.29 30.63,50.6 29.72,50.6 25.15,46.02 v25.15,34.9 | v22.71,32.46 22.71,22.4 v30.02,15.09 | v21.03,4.42 22.1,3.35 23.16,3.35 FPC3.1
  Bottom 0.152: v35.51,50.29 37.49,48.31 39.17,48.31 SR6.15 | v22.71,32.46 v25.15,34.9 | v30.02,15.09 30.02,12.65 28.19,10.82 27.43,10.82 22.55,5.94 22.55,4.12 22.25,3.81 21.64,3.81 v21.03,4.42
SR_OUT6_2  (via drill 0.35)
  Top 0.152: v43.28,48.92 38.41,48.92 35.36,45.87 29.72,45.87 27.89,44.04 27.89,36.73 v26.06,34.9 | v20.73,14.02 20.27,13.56 v20.27,6.1 | v21.95,4.42 22.55,3.81 23.16,3.81 FPC3.2
  Bottom 0.152: v43.28,48.92 43.74,49.38 44.65,49.38 SR6.1 | v26.06,34.9 20.73,29.57 v20.73,14.02 | v21.95,4.42 v20.27,6.1
SR_OUT6_3  (via drill 0.35)
  Top 0.152: v24.54,3.96 24.23,3.96 23.93,4.27 23.32,4.27 FPC3.3
  Bottom 0.152: v24.54,3.96 46.48,3.96 52.43,9.91 52.43,10.52 53.95,12.04 55.78,12.04 57.3,13.56 57.3,37.64 46.79,48.16 44.81,48.16 SR6.2
SR_OUT6_4  (via drill 0.35)
  Top 0.152: v46.02,44.65 42.06,44.65 v37.64,40.23 | v34.44,31.24 34.44,30.48 31.39,27.43 31.39,24.84 30.79,24.23 30.79,19.66 v34.75,15.7 | v25.15,4.72 23.32,4.72 FPC3.4
  Bottom 0.152: v46.02,44.65 46.02,46.18 45.41,46.79 44.81,46.79 SR6.3 | v37.64,40.23 37.64,34.44 v34.44,31.24 | v34.75,15.7 33.98,15.7 28.5,10.21 27.74,10.21 25.15,7.62 v25.15,4.72
SR_OUT6_5  (via drill 0.35)
  Top 0.152: v57.91,11.58 54.71,8.38 40.84,8.38 37.8,5.33 23.32,5.33 FPC3.5
  Bottom 0.152: v57.91,11.58 57.91,37.95 45.87,49.99 43.43,49.99 42.67,49.23 42.67,47.24 44.2,45.72 44.65,45.72 SR6.4
SR_OUT6_6  (via drill 0.35)
  Top 0.152: v49.07,2.74 21.79,2.74 20.42,4.12 20.42,4.72 21.34,5.64 23.16,5.64 FPC3.6
  Bottom 0.152: v49.07,2.74 56.84,10.52 56.84,11.43 57.61,12.19 57.61,37.8 46.63,48.77 44.04,48.77 43.89,48.62 43.89,46.48 44.04,46.33 45.41,46.33 45.72,46.02 45.72,45.26 45.41,44.96 45.26,44.96 44.81,44.5 SR6.5
SR_OUT6_7  (via drill 0.35)
  Top 0.152: v43.59,41.91 44.04,41.91 50.44,35.51 50.44,31.24 49.23,30.02 47.24,30.02 44.96,27.74 44.96,25.15 44.5,24.69 v44.04,24.69 | v24.54,6.4 24.08,6.4 23.93,6.25 23.32,6.25 FPC3.7
  Bottom 0.152: v43.59,41.91 44.65,42.98 SR6.6 | v44.04,24.69 44.04,21.64 43.28,20.88 43.28,19.36 40.23,16.31 34.14,16.31 28.35,10.52 27.58,10.52 24.54,7.47 v24.54,6.4
SR_OUT6_8  (via drill 0.35)
  Top 0.152: v49.84,35.2 v45.72,39.32 | v47.24,19.05 41.91,13.72 41.91,11.28 v40.84,10.21 | v37.64,7.01 24.23,7.01 24.08,6.86 23.32,6.86 FPC3.8
  Bottom 0.152: v45.72,39.32 46.02,39.62 46.02,41.15 45.41,41.76 44.81,41.76 SR6.7 | v49.84,35.2 52.12,32.92 52.12,21.03 50.75,19.66 47.85,19.66 v47.24,19.05 | v37.64,7.01 v40.84,10.21
SR_OUT7_1  (via drill 0.35)
  Top 0.152: v35.36,31.24 35.36,30.94 34.14,29.72 v34.14,24.54 | v21.95,7.47 22.4,7.47 22.55,7.32 23.16,7.32 FPC3.9
  Bottom 0.152: v35.36,31.24 37.19,33.07 39.17,33.07 SR7.15 | v34.14,24.54 34.14,21.49 21.95,9.3 v21.95,7.47
SR_OUT7_2  (via drill 0.35)
  Top 0.152: v36.73,48.16 29.87,48.16 27.28,45.57 v27.28,37.03 | v20.88,13.11 20.88,9.45 22.55,7.77 23.16,7.77 FPC3.10
  Bottom 0.152: v36.73,48.16 36.73,48.01 38.41,46.33 39.78,46.33 41.6,44.5 41.6,42.98 43.43,41.15 45.57,41.15 45.72,41 45.72,40.23 44.81,39.32 44.81,34.59 SR7.1 | v27.28,37.03 27.28,19.51 v20.88,13.11
SR_OUT7_3  (via drill 0.35)
  Top 0.152: v41.15,45.87 37.8,45.87 37.34,45.41 30.79,45.41 30.63,45.57 29.87,45.57 28.19,43.89 28.19,36.12 v26.06,33.98 | v21.49,14.63 21.49,9.3 22.55,8.23 23.16,8.23 FPC3.11
  Bottom 0.152: v41.15,45.87 43.28,43.74 45.41,43.74 46.33,42.82 46.33,34.75 44.81,33.22 SR7.2 | v26.06,33.98 26.06,20.12 21.49,15.54 v21.49,14.63
SR_OUT7_4  (via drill 0.35)
  Top 0.152: v35.36,41.6 v41.6,35.36 | v22.25,15.39 22.25,8.99 22.4,8.84 23.16,8.84 FPC3.12
  Bottom 0.152: v41.6,35.36 41.6,35.05 44.65,32 SR7.3 | v35.36,41.6 35.36,41.15 32.46,38.25 27.58,38.25 26.67,37.34 26.67,19.81 v22.25,15.39
SR_OUT7_5  (via drill 0.35)
  Top 0.152: v39.62,8.08 25.15,8.08 24.08,9.14 23.32,9.14 FPC3.13
  Bottom 0.152: v39.62,8.08 41.15,9.6 50.9,9.6 51.82,10.52 51.82,15.09 53.8,17.07 55.78,17.07 57,18.29 57,37.49 51.97,42.52 51.36,42.52 49.23,40.39 49.23,35.05 45.41,31.24 45.26,31.24 44.81,30.79 SR7.4
SR_OUT7_6  (via drill 0.35)
  Top 0.152: v50.9,24.54 50.9,24.23 47.85,21.18 47.85,18.75 47.4,18.29 46.94,18.29 42.22,13.56 42.22,10.67 v41.91,10.36 | v28.04,9.6 24.08,9.6 23.93,9.75 23.32,9.75 FPC3.14
  Bottom 0.152: v50.9,24.54 46.18,29.26 44.81,29.26 SR7.5 | v41.91,10.36 41.6,10.36 41.15,10.82 40.54,10.82 40.08,10.36 40.08,10.21 39.47,9.6 v28.04,9.6
SR_OUT7_7  (via drill 0.35)
  Top 0.152: v40.69,28.04 36.42,28.04 35.05,26.67 v35.05,24.54 | v24.54,10.21 23.32,10.21 FPC3.15
  Bottom 0.152: v40.69,28.04 44.65,28.04 SR7.6 | v35.05,24.54 35.05,21.95 24.54,11.43 v24.54,10.21
SR_OUT7_8  (via drill 0.35)
  Top 0.152: v51.51,23.01 56.69,23.01 57.15,22.55 57.15,13.41 55.78,12.04 47.24,12.04 43.89,8.69 29.87,8.69 27.74,10.82 23.32,10.82 FPC3.16
  Bottom 0.152: v51.51,23.01 47.7,26.82 SR7.7
SR_OUT8_1  (via drill 0.35)
  Top 0.152: v27.89,11.43 24.08,11.43 23.93,11.28 23.32,11.28 FPC3.17
  Bottom 0.152: v27.89,11.43 27.89,13.87 32.16,18.14 39.17,18.14 SR8.15
SR_OUT8_2  (via drill 0.35)
  Top 0.152: v46.63,15.24 44.04,12.65 44.04,10.67 42.37,8.99 31.24,8.99 28.19,12.04 24.23,12.04 23.93,11.73 23.32,11.73 FPC3.18
  Bottom 0.152: v46.63,15.24 47.85,16.46 47.85,17.37 45.87,19.36 44.81,19.36 SR8.1
SR_OUT8_3  (via drill 0.35)
  Top 0.152: v47.24,17.07 47.24,16.31 46.79,15.85 46.33,15.85 43.74,13.26 43.74,10.82 42.22,9.3 31.39,9.3 28.35,12.34 23.47,12.34 23.32,12.19 FPC3.19
  Bottom 0.152: v47.24,17.07 46.18,18.14 44.81,18.14 SR8.2
SR_OUT8_4  (via drill 0.35)
  Top 0.152: v46.48,16.46 43.43,13.41 43.43,10.97 42.06,9.6 31.55,9.6 28.5,12.65 23.32,12.65 FPC3.20
  Bottom 0.152: v46.48,16.46 46.18,16.76 44.81,16.76 SR8.3
SR_OUT8_5  (via drill 0.35)
  Top 0.152: v45.87,22.55 45.87,27.43 47.24,28.8 49.23,28.8 50.75,30.33 50.75,43.28 FPC4.1
  Bottom 0.152: v45.87,22.55 43.89,20.57 43.89,16.46 44.65,15.7 SR8.4
SR_OUT8_6  (via drill 0.35)
  Top 0.152: v46.33,14.02 48.16,15.85 48.16,16.46 49.23,17.53 v51.66,17.53 | v51.66,41.91 51.66,43.59 51.51,43.74 50.9,43.74 FPC4.2
  Bottom 0.152: v46.33,14.02 46.02,14.33 44.81,14.33 SR8.5 | v51.66,17.53 51.66,17.98 52.43,18.75 52.43,41.15 v51.66,41.91
SR_OUT8_7  (via drill 0.35)
  Top 0.152: v41.3,13.87 41.3,15.85 50.9,25.45 v51.36,25.45 | v51.36,32.77 51.36,40.69 52.27,41.6 52.27,43.59 51.51,44.35 50.9,44.35 FPC4.3
  Bottom 0.152: v41.3,13.87 42.98,13.87 43.74,13.11 44.65,13.11 SR8.6 | v51.36,32.77 v51.36,25.45
SR_OUT8_8  (via drill 0.35)
  Top 0.152: v46.18,11.89 49.23,14.94 56.24,14.94 56.84,15.54 56.84,21.95 v56.39,22.4 | v56.39,36.73 52.58,40.54 52.58,43.74 51.51,44.81 50.9,44.81 FPC4.4
  Bottom 0.152: v46.18,11.89 44.81,11.89 SR8.7 | v56.39,36.73 v56.39,22.4
VCC  (via drill 0.35)
  Top 0.152: v35.97,52.73 32.16,52.73 30.79,54.1 | 30.79,54.1 30.33,54.56 U1.24 30.79,54.1 | v12.04,32.61 v12.04,27.74 14.94,24.84 14.94,18.59 16.92,16.61 17.68,16.61 | JP2.1 54.86,10.97 50.14,10.97 JP4.1 | 46.94,27.28 46.48,26.82 46.48,22.25 43.89,19.66 v42.22,19.66 39.01,22.86 35.2,22.86 35.05,22.71 35.05,21.34 37.95,18.44 37.95,13.26 | 46.94,27.28 47.09,27.43 49.23,27.43 51.05,29.26 51.05,30.79 54.56,34.29 55.02,34.29 U2.14 55.17,34.44 57,36.27 57,47.85 51.36,53.49 47.09,53.49 44.5,50.9 29.72,50.9 29.11,51.51 29.11,52.43 30.79,54.1 | 46.94,27.28 v46.79,27.43 | 37.95,13.26 v37.95,12.19 | 17.68,16.61 27.13,16.61 30.48,13.26 37.95,13.26 | v8.84,45.72 8.84,44.96 3.2,39.32 3.2,18.59 10.52,11.28 13.26,11.28 17.68,15.7 17.68,16.61
  Bottom 0.152: 40.39,58.67 40.39,63.25 39.32,64.31 SR5.16 | 40.39,58.67 40.39,57.91 39.32,56.84 SR5.10 | v35.97,52.73 39.17,49.53 SR6.16 | 40.39,58.67 34.29,58.67 30.33,54.71 U1.24 | 9.45,46.33 10.97,46.33 12.34,44.96 12.34,43.43 10.82,41.91 10.21,41.91 SR2.10 | 9.45,46.33 9.3,46.48 9.3,48.62 10.06,49.38 SR2.16 10.06,49.53 9.3,50.29 9.3,55.93 10.06,56.69 SR1.10 10.21,56.84 11.12,57.76 11.12,58.52 10.97,58.67 9.6,58.67 9.3,58.98 9.3,59.74 9.6,60.05 10.97,60.05 11.43,60.5 11.43,63.7 10.82,64.31 10.21,64.31 SR1.16 | 10.21,19.51 11.12,18.59 11.12,17.83 10.82,17.53 9.45,17.53 9.3,17.37 9.3,16.46 9.45,16.31 10.97,16.31 12.04,15.24 12.04,13.56 10.97,12.5 10.82,12.5 10.21,11.89 SR4.10 | 10.21,19.51 11.28,20.57 11.28,23.16 9.3,25.15 9.3,26.06 10.06,26.82 SR3.10 10.21,26.98 10.82,26.98 11.58,27.74 v12.04,27.74 | 10.21,19.51 SR4.16 | v12.04,32.61 12.04,33.07 10.67,34.44 10.21,34.44 SR3.16 | JP4.1 49.99,10.82 49.07,9.91 43.43,9.91 41.6,11.73 39.32,11.73 SR8.10 39.17,11.89 38.25,11.89 v37.95,12.19 | SR7.16 39.17,34.59 39.17,39.32 38.25,40.23 38.25,40.84 39.17,41.76 SR6.10 39.32,41.76 41,40.08 41,31.85 44.2,28.65 45.57,28.65 v46.79,27.43 | SR7.10 39.17,26.82 36.73,24.38 36.73,20.27 37.49,19.51 39.17,19.51 SR8.16 39.32,19.51 39.47,19.66 v42.22,19.66 | v8.84,45.72 9.45,46.33

## Text on the board
tNames: Decoder_Input | 1 | 1 | 2 | 2 | FPC1 | FPC4 | FPC2 | Latch | Clock | Data | GND | VCC | FPC3
bNames: Hsia & Warren / 2023/6/6 SR Control Board